# Altium PCB HE.PcbDoc
Units mm, origin at the board's own origin, x right, y up, seen from the top; angles counter-clockwise.
Board outline 152.4 x 101.6 mm, 2 copper layers (Top Layer, Bottom Layer); 9 components, 144 nets, 15 pads, 0 vias.
Unrouted connection lines stored in the file: 4.
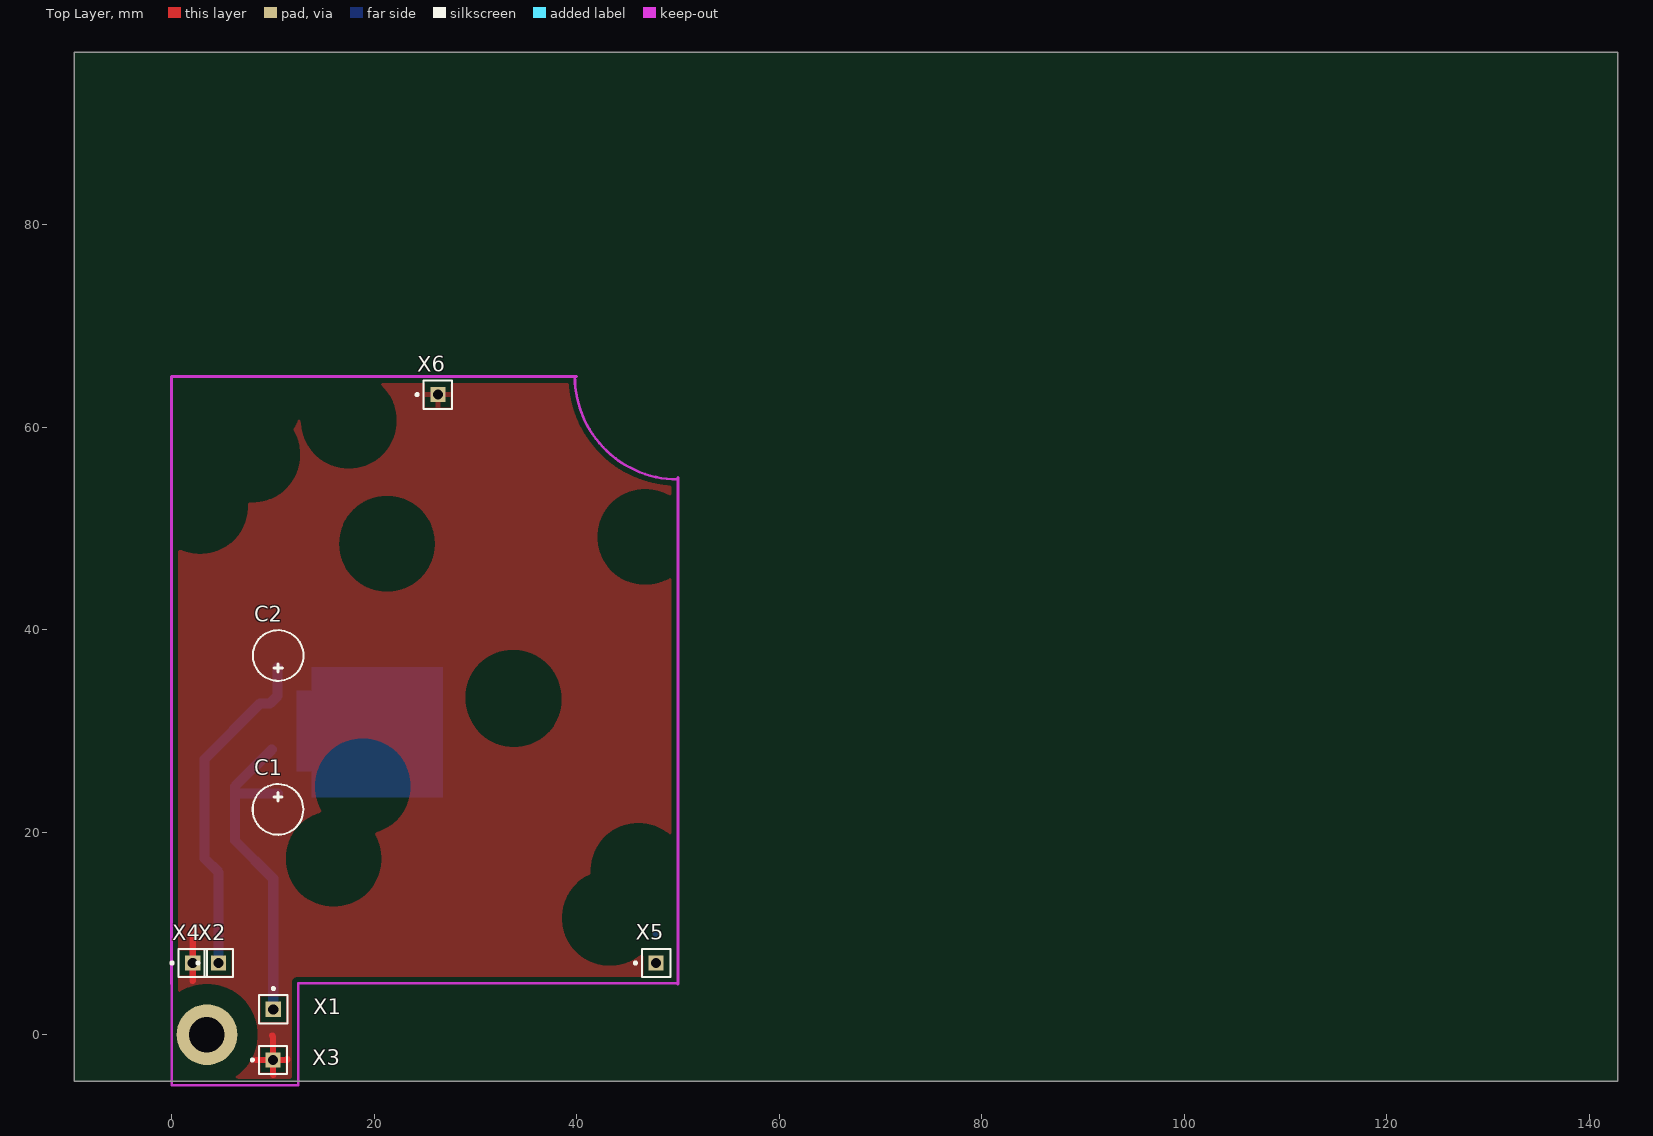
[diagram p0: Top Layer view]
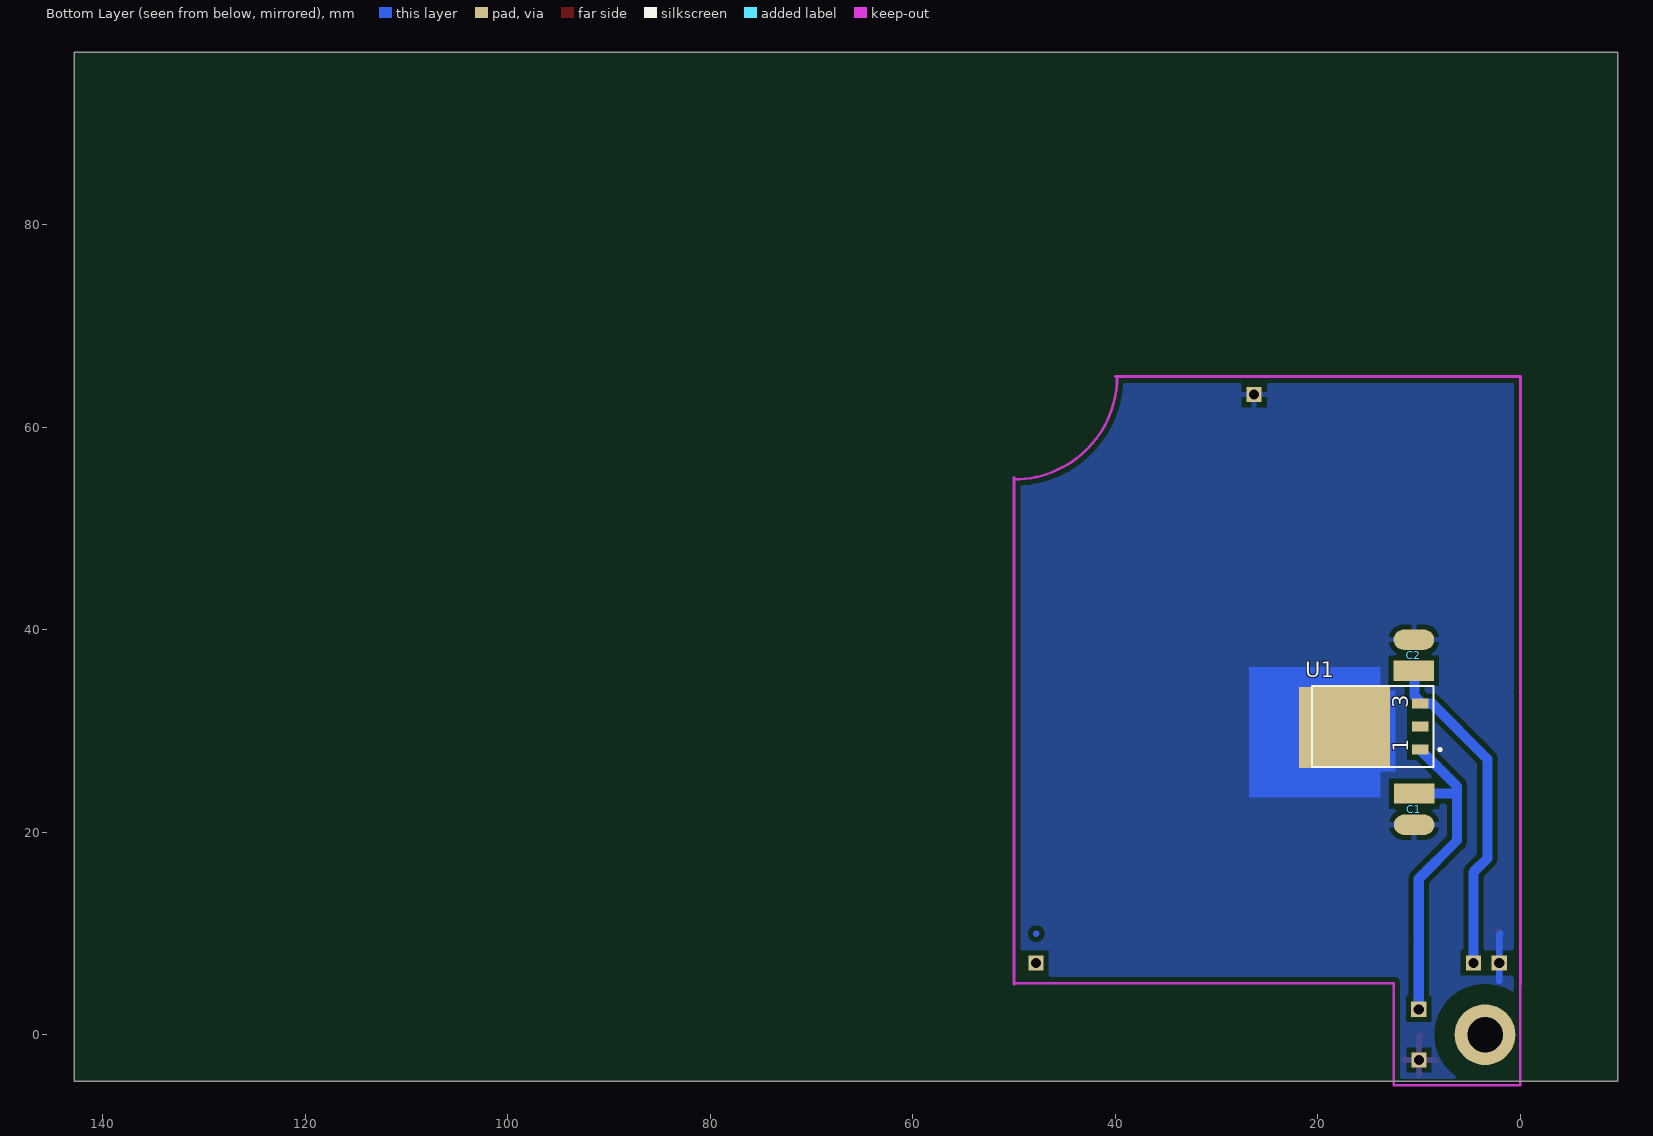
[diagram p1: Bottom Layer view, seen from below]

## Layer stack, top to bottom
Top Layer: signal copper 0.0356
Dielectric: dielectric 0.32, FR-4, Dk 4.8
Bottom Layer: signal copper 0.0356

## Board outline
-9.6,-4.6 142.8,-4.6 142.8,97 -9.6,97

## Design rules (kind name [scope] priority, off if disabled: settings)
Clearance POLY1 [InPoly vs HasPad('Free-0')] p1: gap=2
Clearance POLY [InPoly] p2: gap=0.5
Clearance mega [InComponent(U1)] p3: gap=0.2
Clearance [All] p4: gap=0.3
ComponentClearance [All] p1: gap=0.01 collisioncheckmode=0
PolygonConnect [All] p1: connectstyle=Relief reliefconductorwidth=0.5 reliefentries=4 polygonreliefangle="90 Angle"
RoutingLayers [All] p1: top layer=Horizontal bottom layer=Vertical
RoutingVias [All] p1: holewidth=0.7 width=1.2 viastyle="Through Hole" minholewidth=0.6 minwidth=1.1 maxholewidth=0.85 maxwidth=1.5
SolderMaskExpansion [All] p1: expansion=0.102
TestPointUsage [All] p1: valid=0 allowmultiple=FALSE
Testpoint [All] p1: side=15 testpointundercomponent=TRUE minsize=1.016 maxsize=2.54 preferedsize=1.524 minholesize=0 maxholesize=1.016 preferedholesize=0.813 testpointgrid=0.025 style=1023 order=-539222988
Width [All] p1: maxlimit=2 minlimit=0.254 preferedwidth=0.254 toplayer_prefwidth=0.5 bottomlayer_prefwidth=1 minimp=50.000000 maximp=50.000000 favimp=50.000000
16 further rules are at their usual default settings.

## Components (designator, comment, footprint, x,y, rotation, side; value= is the part's Value field where it differs from the comment)
C1 "" el3#1 10.525,23.5 r270 top
C2 "" el3#2 10.525,36.175 r90 top
U1 "MC78M05CDT" SIP-G3/C7 13.4,30.425 r90 bottom
X1 "" PIN1 10.05,2.5 r0 top
X2 "" PIN1 4.65,7.075 r90 top
X3 "" PIN1 10.025,-2.5 r90 top
X4 "" PIN1 2.1,7.075 r90 top
X5 "" PIN1 47.85,7.075 r90 top
X6 "" PIN1 26.3,63.2 r90 top

## Footprints (in the part's own frame and the unit in brackets; to place one, negate y for a bottom-side part, rotate by r counter-clockwise, add the part's x,y. Pads: shape width x height; smd on the part's side, far side on the other; paste and mask are expansions set on the pad)
el3#1 [mm]
  rect 2x4 smd far side: 1(-0.3,-0.025)
  oval 2x4 smd far side: 2(2.775,-0.025)
  silkscreen extent -1.24,-2.5 3.76,2.49
el3#2 [mm]
  rect 2x4 smd far side: 1(-0.25,0)
  oval 2x4 smd far side: 2(2.825,0)
  silkscreen extent -1.24,-2.51 3.76,2.49
PIN1 [mm]
  rect 1.5x1.5 hole 1: 1(0,0)
  silkscreen extent -1.4,-1.4 1.4,2.17
SIP-G3/C7 [mm]
  rect 1x1.6 smd: 1(-2.285,-3.5) 2(0,-3.5) 3(2.285,-3.5)
  rect 8x9 smd: 4(-0.1,3.975)
  silkscreen extent -4,-5.57 4,7.2

## Part data
C1 C2: library part "Cap Pol", "Polarized Capacitor (Radial)"
U1: "3-Terminal Medium-Current Positive Fixed Voltage Regulator"
X1 X2 X3 X4 X5 X6: library part Socket, "Socket"

## Free pads (board coordinates)
  round 6 hole 3.5: 0(3.5,0)

## Nets (pads, with @x,y where several pads share a name; then routed paths per layer and width w, separated by ;. In a path a pad name is that pad's centre, name@x,y a point inside that pad or via, vN(x,y) a via of type N, cw(c..) or ccw(c..) an arc to the next point about the centre after c; other vN are vias at no path point)
+12V: 
AN0: 
AN1: 
AN2: 
AN3: 
BL0: 
BL1: 
C0: 
C1: 
C2: 
C3: 
C4: 
C5: 
C7: 
C8: 
CS: 
D2: 
D3: 
D4: 
D4: 
D4: 
D5: 
D6: 
D7: 
ID0: 
ID0: 
ID1: 
ID2: 
IN0: 
IN1: 
IN2: 
IN3: 
IN4: 
IN5: 
LED0: 
LED1: 
MISO: 
MOSI: 
Net1_1: 
Net2_1: 
Net3_1: 
NetC1_1: C1.1 U1.1 X1.1 | length 32.9
  Bottom Layer w1: 6.275,23.825 10.475,23.825 C1.1 ; U1.1 6.275,24.515 6.275,19.175 10.05,15.4 X1.1
NetC1_2: C1.2 C2.2
NetC1_2: U1.4 X3.1 X4.1 X5.1 X6.1
NetC2_1: C2.1 U1.3 X2.1 | length 33.3
  Bottom Layer w1: X2.1 4.65,16.025 3.275,17.4 3.275,27.225 8.76,32.71 9.735,32.71 10.475,33.45 C2.1@10.475,36.3
NetC2_2: 
NetC3_2: 
NetC3_2: 
NetC4_2: 
NetC4_2: 
NetC17_2: 
NetC21_2: 
NetC22_1: 
NetC23_1: 
NetC25_2: 
NetC26_2: 
NetD1_2: 
NetD2_1: 
NetD2_2: 
NetD3_2: 
NetD4_8: 
NetD14_2: 
NetJ1_2: 
NetJ2_2: 
NetJmp1_2: 
NetJmp2_2: 
NetJP1_5: 
NetJP1_6: 
NetJP1_7: 
NetJP1_8: 
NetJP1_15: 
NetJP1_16: 
NetJP1_17: 
NetJP1_17: 
NetJP1_25: 
NetJP1_27: 
NetJP1_28: 
NetJP3_2: 
NetQ1_1: 
NetQ2_1: 
NetQ2_3: 
NetR14_1: 
NetR15_1: 
NetR24_1: 
NetR30_2: 
NetR31_2: 
NetR34_1: 
NetR35_1: 
NetR36_1: 
NetR41_2: 
NetU1_11: 
NetU1_30: 
NetU2_1: 
NetU2_4: 
NetU3_4: 
NetU3_6: 
NetU3_7: 
PA1: 
PA2: 
PA4: 
PA5: 
PB0: 
PB1: 
PB2: 
PB3: 
PB4: 
PB6: 
PB7: 
PC1: 
PC2: 
PC3: 
PC5: 
PC7: 
PD1: 
PE6: 
PG0: 
PG1: 
PWMI: 
PWMU: 
PWMU: 
PWMU: 
RES: 
RX: 
RX: 
RX: 
RX: 
RX: 
RX: 
RXD: 
RXD: 
SCK: 
TX: 
TX: 
TX: 
TX: 
TX: 
TX: 
TX: 
TX: 
TX: 
TX: 
TX: 
TX: 
TXS: 
pads on no net: U1.2
copper on no net: | length 17
  Top Layer w0.6: 2.1,5.3 2.1,7.075 2.1,10.175 2.2,10.275 ; 8.275,-2.5 10.025,-2.5 ; 9.95,-0.1 10.025,-0.175 10.025,-2.5 ; 10.05,-4 10.025,-3.975 10.025,-2.5 ; 11.425,-2.4 11.425,-2.475 11.4,-2.5 10.025,-2.5
  Bottom Layer w0.6: 2,9.975 2.1,9.875 2.1,7.075 2.1,5.3 ; 47.8,10 47.85,9.95

## Polygon pours and split planes (outlines as drawn)
NetC1_2 on Top Layer (hatched 90Degree grid 0.1 track 0.3, remove dead copper): -1.5,68.7 -1.5,-6.875 53.275,-6.875 53.275,69.225 -1.4,69.225 -1.4,67.875 2.85,72.125
NetC1_2 on Bottom Layer (hatched 90Degree grid 0.1 track 0.3, remove dead copper): -1.175,-5.8 13.125,-5.8 13.125,4.425 51.325,4.425 51.325,66.775 -0.875,66.775 -0.875,-5.8

## Keep-outs
Keep-Out Layer:
  lines w0.25: 0,5 0,-5 12.5,-5 12.5,5.075 49.925,5.075 50,5
  lines w0.254: 39.825,65 ccw(c50,65) 50,54.825
  lines w0.3: 0,5 0,65 40,65 ; 50,5 50,55

## Other copper
Bottom Layer:
  rectangle: 13.825,23.4 26.8,36.3
  rectangle: 12.35,25.975 25.1,34

## Silkscreen, mask and mechanical layers (free items; w line width, h text height)
Mechanical 1:
  lines w0.25: 2.1,4.95 2.1,7.1 49.15,7.1 ; 4.64,4.565 4.64,7.1 ; 26.35,61.675 26.3,61.725 26.3,63.25 28.475,63.25 ; 47.82,7.1 47.82,4.305 47.85,4.275

## Dimensions
0,-5 to 0,65 on Mechanical 1
0,65 to 40,65 on Mechanical 1

## Text inside footprints (layer, text, board x,y; h text height)
U1: Bottom Overlay "3" at 11.075,32.213 h1.5 r270; Bottom Overlay "1" at 11.075,27.89 h1.5 r270